# Allegro board RFPW_V10A.brd
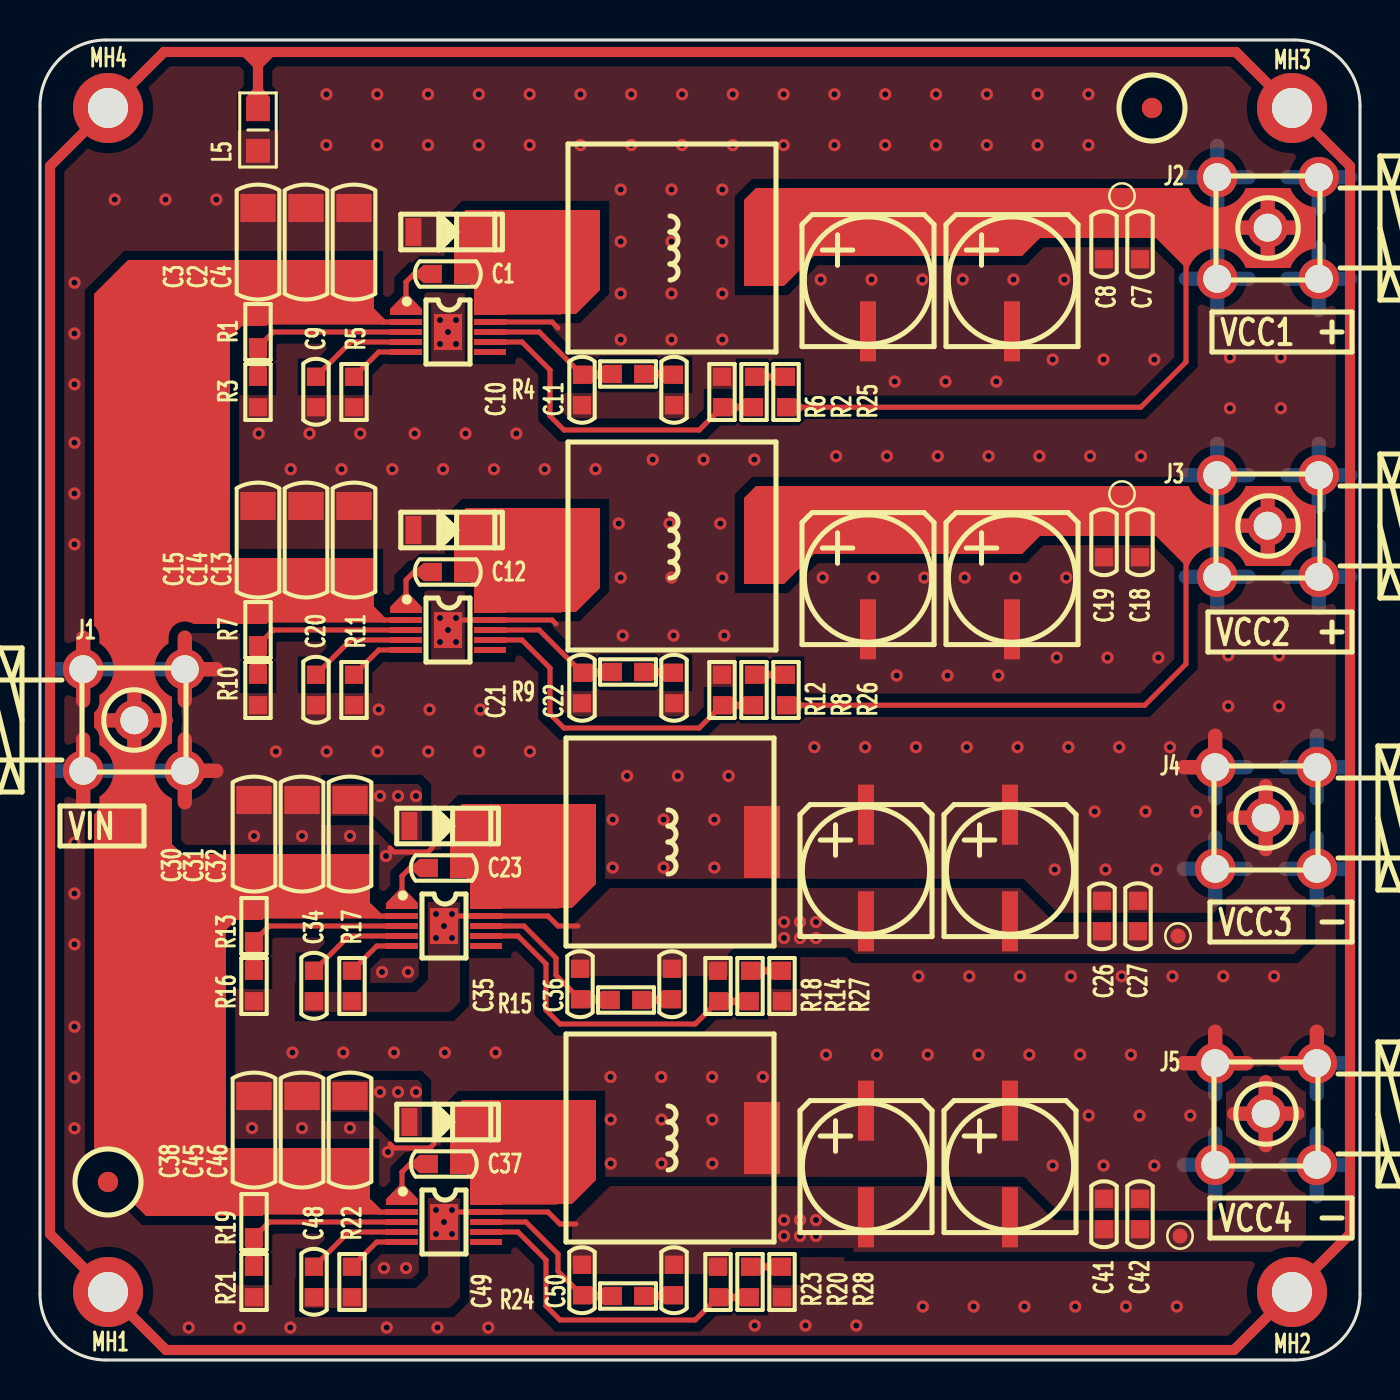
[diagram p0: board, top side]
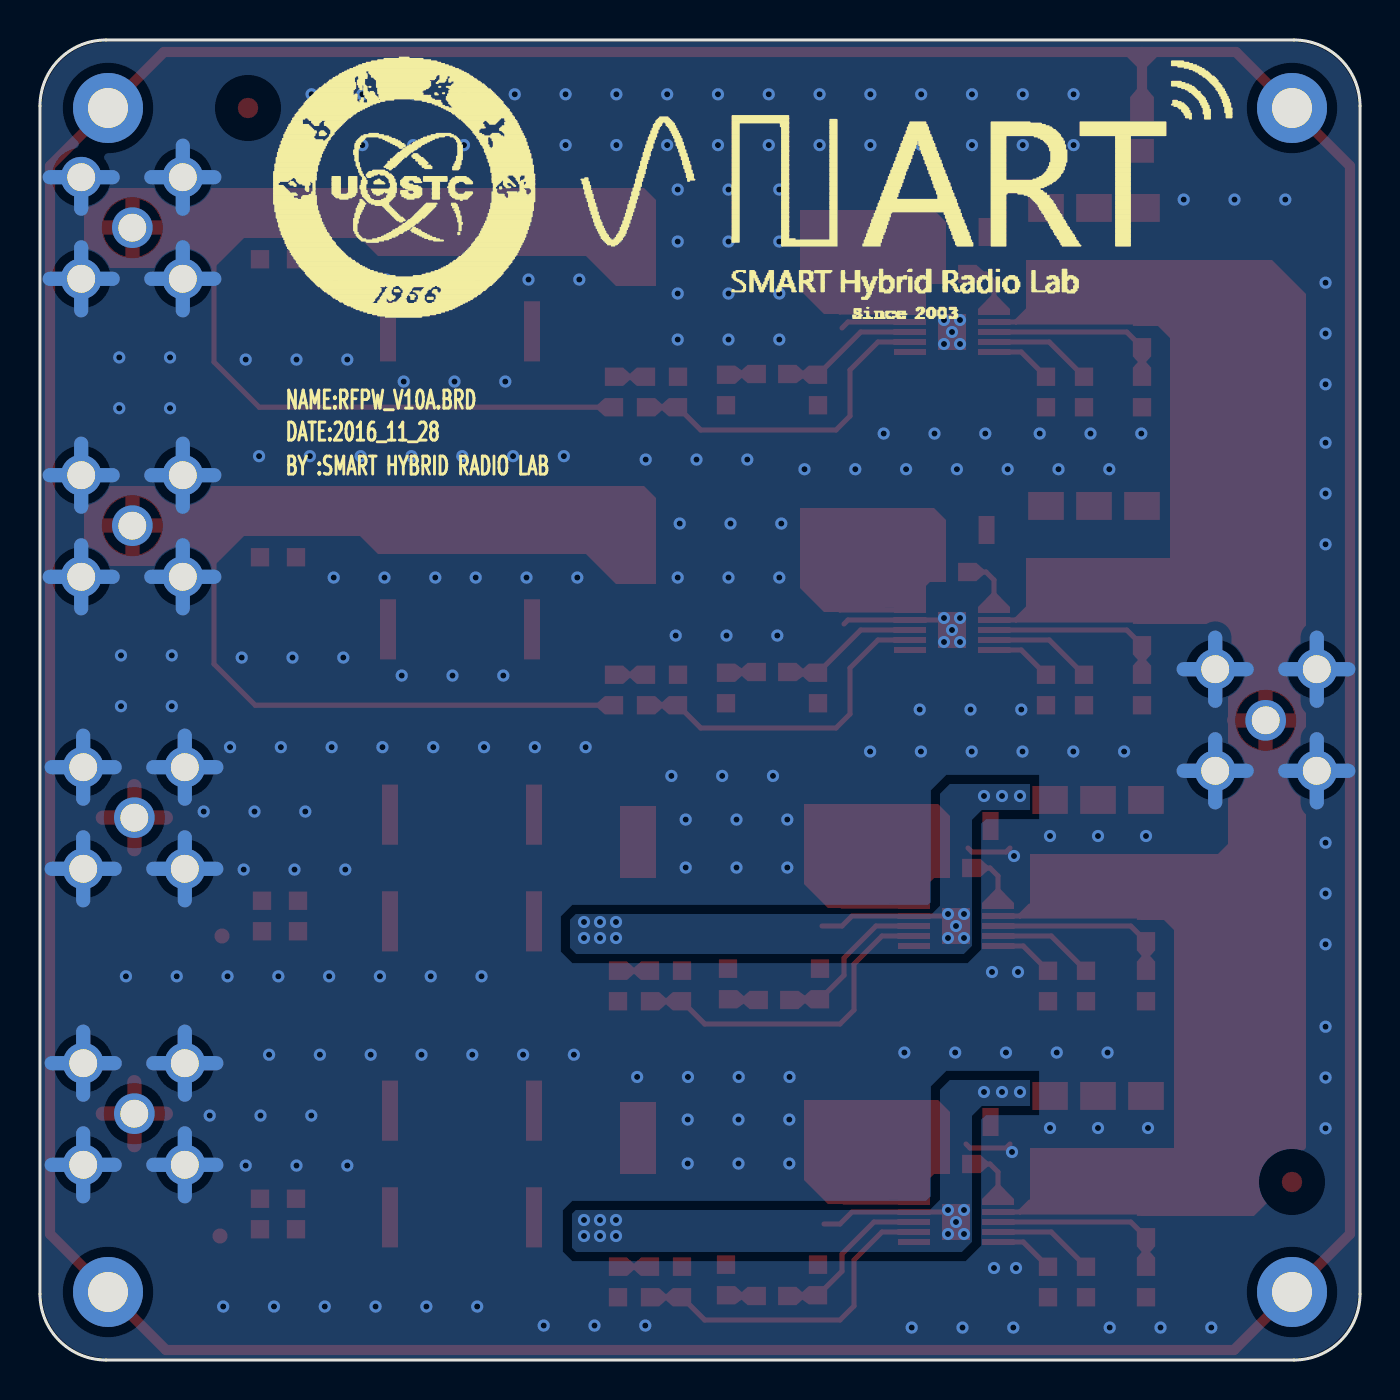
[diagram p1: board, bottom side, seen from below]

Outline 66 x 66 mm; copper layers: TOP, BOTTOM. Coordinates in mm from the lower left corner of the outline.
Outline path: 0,62.7 0,3.3 arc(0.97,0.97) 3.3,0 62.7,0 arc(65.03,0.97) 66,3.3 66,62.7 arc(65.03,65.03) 62.7,66 3.3,66 arc(0.97,65.03) 0,62.7

## Placement (name value [footprint] x y rotation side)
C1  0.1uF_50V  [CC0603]  20.4 54.3 180 top
C2  2.2uF_50V  [CC1206]  13.3 55.9 90 top
C3  2.2uF_50V  [CC1206]  10.9 55.9 90 top
C4  2.2uF_50V  [CC1206]  15.7 55.9 90 top
C5  47uF_50V_ED6R3  [CAP-ED6R3]  41.4 54.1 90 top
C6  47uF_50V_ED6R3  [CAP-ED6R3]  48.6 54.1 90 top
C7  0.1uF_50V  [CC0603]  55 55.8 270 top
C8  1nF_50V  [CC0603]  53.2 55.8 270 top
C9  6.8nF_50V  [CC0603]  13.8 48.4 90 top
C10  2.7nF_50V  [CC0603]  27.1 48.5 90 top
C11  2.7nF_50V  [CC0603]  31.7 48.5 90 top
C12  0.1uF_50V  [CC0603]  20.4 39.4 180 top
C13  2.2uF_50V  [CC1206]  15.7 41 90 top
C14  2.2uF_50V  [CC1206]  13.3 41 90 top
C15  2.2uF_50V  [CC1206]  10.9 41 90 top
C16  47uF_50V_ED6R3  [CAP-ED6R3]  48.6 39.2 90 top
C17  47uF_50V_ED6R3  [CAP-ED6R3]  41.4 39.2 90 top
C18  0.1uF_50V  [CC0603]  55 40.9 270 top
C19  1nF_50V  [CC0603]  53.2 40.9 270 top
C20  6.8nF_50V  [CC0603]  13.8 33.5 90 top
C21  2.7nF_50V  [CC0603]  27.1 33.6 90 top
C22  2.7nF_50V  [CC0603]  31.7 33.6 90 top
C23  0.1uF_50V  [CC0603]  20.2 24.6 180 top
C24  47uF_50V_ED6R3  [CAP-ED6R3]  41.3 24.6 90 top
C25  47uF_50V_ED6R3  [CAP-ED6R3]  48.5 24.6 90 top
C26  0.1uF_50V  [CC0603]  53.1 22.2 270 top
C27  1nF_50V  [CC0603]  54.9 22.2 270 top
C30  2.2uF_50V  [CC1206]  10.7 26.3 90 top
C31  2.2uF_50V  [CC1206]  13.1 26.3 90 top
C32  2.2uF_50V  [CC1206]  15.5 26.3 90 top
C34  0.1uF_50V  [CC0603]  13.7 18.7 90 top
C35  82pF_50V  [CC0603]  27 18.8 270 top
C36  27nF_50V  [CC0603]  31.6 18.8 270 top
C37  0.1uF_50V  [CC0603]  20.2 9.8 180 top
C38  2.2uF_50V  [CC1206]  10.7 11.5 90 top
C39  47uF_50V_ED6R3  [CAP-ED6R3]  41.3 9.8 90 top
C40  47uF_50V_ED6R3  [CAP-ED6R3]  48.5 9.8 90 top
C41  0.1uF_50V  [CC0603]  53.2 7.3 270 top
C42  1nF_50V  [CC0603]  55 7.3 270 top
C45  2.2uF_50V  [CC1206]  13.1 11.5 90 top
C46  2.2uF_50V  [CC1206]  15.5 11.5 90 top
C48  0.1uF_50V  [CC0603]  13.7 3.9 90 top
C49  82pF_50V  [CC0603]  27.1 4 270 top
C50  27nF_50V  [CC0603]  31.7 4 270 top
D1  LMBR0540T1G_SOD-123  [SOD-123]  18.8 56.4 0 top
D2  LMBR0540T1G_SOD-123  [SOD-123]  18.8 41.5 0 top
D3  LMBR0540T1G_SOD-123  [SOD-123]  18.6 26.7 0 top
D4  LMBR0540T1G_SOD-123  [SOD-123]  18.6 11.9 0 top
J1  SMA-50R  [SMA-50R-DIP]  4.7 32 180 top
J2  SMA-50R  [SMA-50R-DIP]  61.4 56.6 0 top
J3  SMA-50R  [SMA-50R-DIP]  61.4 41.7 0 top
J4  SMA-50R  [SMA-50R-DIP]  61.3 27.1 0 top
J5  SMA-50R  [SMA-50R-DIP]  61.3 12.3 0 top
L1  SMDRH105R-331M  [L100100]  31.6 55.6 0 top
L2  SMDRH105R-331M  [L100100]  31.6 40.7 0 top
L3  SMDRH104R-151MT  [L100100]  31.5 25.9 0 top
L4  SMDRH104R-151MT  [L100100]  31.5 11.1 0 top
L5  BEAD_BLM21PG600  [LC0805]  10.9 61.5 270 top
MH1  Hold  [HOLD175D100]  3.4 3.4 0 top
MH2  Hold  [HOLD175D100]  62.6 3.4 0 top
MH3  Hold  [HOLD175D100]  62.6 62.6 0 top
MH4  Hold  [HOLD175D100]  3.4 62.6 0 top
MP1  MarkPoint  [MARKPOINT_R3]  55.6 62.6 0 top
MP2  MarkPoint  [MARKPOINT_R3]  3.4 8.9 0 top
NOREF  -  []  6 0 90 top
NOREF#2  -  []  0 3.7 0 top
NOREF#3  -  []  5 0 90 top
NOREF#4  -  []  0 3.7 0 top
NOREF#5  -  []  5 0 90 top
NOREF#6  -  []  0 3.7 0 top
R1  105K  [RC0603]  10.9 51.4 270 top
R2  294K  [RC0603]  35.7 48.4 270 top
R3  5.11K  [RC0603]  10.9 48.4 270 top
R4  105K  [RC0603]  29.4 49.3 0 top
R5  309K  [RC0603]  15.7 48.4 270 top
R6  10K  [RC0603]  34.1 48.4 90 top
R7  105K  [RC0603]  10.9 36.5 270 top
R8  294K  [RC0603]  35.7 33.5 270 top
R9  105K  [RC0603]  29.4 34.4 0 top
R10  5.11K  [RC0603]  10.9 33.5 270 top
R11  309K  [RC0603]  15.7 33.5 270 top
R12  10K  [RC0603]  34.1 33.5 90 top
R13  105K  [RC0603]  10.7 21.7 270 top
R14  14K  [RC0603]  35.5 18.7 270 top
R15  52.3K  [RC0603]  29.3 18 0 top
R16  5.11K  [RC0603]  10.7 18.7 270 top
R17  237K  [RC0603]  15.6 18.7 270 top
R18  1K  [RC0603]  33.9 18.7 90 top
R19  105K  [RC0603]  10.7 6.9 270 top
R20  14K  [RC0603]  35.5 3.9 270 top
R21  5.11K  [RC0603]  10.7 3.9 270 top
R22  237K  [RC0603]  15.6 3.9 270 top
R23  1K  [RC0603]  33.9 3.9 90 top
R24  52.3K  [RC0603]  29.4 3.2 0 top
R25  0R  [RC0603]  37.3 48.4 90 top
R26  0R  [RC0603]  37.3 33.5 90 top
R27  0R  [RC0603]  37.1 18.7 90 top
R28  0R  [RC0603]  37.1 3.9 90 top
TP1  TestPoint  [TP-0R75]  54.1 58.2 0 top
TP2  TestPoint  [TP-0R75]  54.1 43.3 0 top
TP4  TestPoint  [TP-0R75]  56.9 21.2 0 top
TP6  TestPoint  [TP-0R75]  57 6.2 0 top
U1  TPS54060DGQR  [MSOP-10-PAD]  20.4 51.4 270 top
U2  TPS54060DGQR  [MSOP-10-PAD]  20.4 36.5 270 top
U3  TPS54060DGQR  [MSOP-10-PAD]  20.2 21.7 270 top
U5  TPS54060DGQR  [MSOP-10-PAD]  20.2 6.9 270 top

## Library data of the parts
C1 C7-C12 C18-C23 C26 C27 C34-C37 C41 C42 C48-C50 = CAP NP
C2-C4 C13-C15 C30-C32 C38 C45 C46 = CAP NP_2
C5 C6 C16 C17 C24 C25 C39 C40 = CAPT_100UF_3528_6r3V_10%_LXXXX
D1-D4 = DIODE13_1
J1-J5 = SMA-50R_0
L1-L4 = IND_BEAD_0805_600OHM_1
L5 = IND_BEAD_0805_600OHM_200MA
MH1-MH4 = Hold_1
MP1 MP2 = MarkPoint
R1-R28 = R_Generic
TP1 TP2 TP4 TP6 = TestPoint
U1-U3 U5 = TPS54060DGQR

## Footprints (pads in the part's own frame, mm; a bottom-side part is the same pattern mirrored in y, then rotated)
CAP-ED6R3
  rect 3x0.8 smd: 1(2.667,0) 2(-2.667,0)
CC0603
  rect 0.914x0.914 smd: 1(-0.762,0) 2(0.762,0)
CC1206
  rect 1.397x1.778 smd: 1(-1.702,0) 2(1.702,0)
HOLD175D100
  round 3.5 hole 2: 1(0,0)
L100100
  rect 1.8x3.6 smd: 1(-4.6,0) 2(4.6,0)
LC0805
  rect 1.194x1.194 smd: 1(-1.041,0) 2(1.041,0)
MARKPOINT_R3
  round 1.016 smd: 1(0,0)
MSOP-10-PAD
  rect 0.3x1.6 smd: 1(-1,-2.1) 2(-0.5,-2.1) 3(0,-2.1) 4(0.5,-2.1) 5(1,-2.1) 6(1,2.1) 7(0.5,2.1) 8(0,2.1) 9(-0.5,2.1) 10(-1,2.1)
  rect 1.8x1.4 smd: 11(0,0)
RC0603
  rect 0.914x0.914 smd: 1(-0.762,0) 2(0.762,0)
SMA-50R-DIP
  round 2.032 hole 1.397: 1(-0.016,0.016) 2(-2.54,2.54) 3(-2.54,-2.54) 4(2.54,-2.54) 5(2.54,2.54)
SOD-123
  rect 0.8x1.4 smd: 1(-0.127,0) 2(3.327,0)
TP-0R75
  round 0.75 smd: 1(0,0)

## Nets
GND: C2.2 C3.2 C4.2 C5.2 C6.2 C7.2 C8.2 C9.1 C10.1 C11.1 C13.2 C14.2 C15.2 C16.2 C17.2 C18.2 C19.2 C20.1 C21.1 C22.1 C24.1 C25.1 C26.1 C27.1 C30.2 C31.2 C38.2 C39.1 C40.1 C41.1 C42.1 C45.2 D1.1 D2.1 J1.2 J1.3 J1.4 J1.5 J2.2 J2.3 J2.4 J2.5 J3.2 J3.3 J3.4 J3.5 J4.2 J4.3 J4.4 J4.5 J5.2 J5.3 J5.4 J5.5 L3.2(B) L4.2(B) L5.2(B) R3.2 R5.2 R6.2 R10.2 R11.2 R12.2 R16.2 R21.2 R27.1 R28.1 U1.9(GND_1) U1.11(GND_2) U2.9(GND_1) U2.11(GND_2)
VCC_IN: C2.1 C3.1 C4.1 C13.1 C14.1 C15.1 C30.1 C31.1 C32.1 C38.1 C45.1 C46.1 J1.1 R1.1 R7.1 R13.1 R19.1 U1.2(VIN) U2.2(VIN) U3.2(VIN) U5.2(VIN)
VCC_OUT1: C5.1 C6.1 C7.1 C8.1 J2.1 L1.2(B) R25.1 TP1.1
VCC_OUT2: C16.1 C17.1 C18.1 C19.1 J3.1 L2.2(B) R26.1 TP2.1
VCC_OUT3: C24.2 C25.2 C26.2 C27.2 C32.2 C34.1 C35.1 C36.1 D3.1 J4.1 R17.2 R18.2 TP4.1 U3.9(GND_1) U3.11(GND_2)
VCC_OUT4: C39.2 C40.2 C41.2 C42.2 C46.2 C48.1 C49.1 C50.1 D4.1 J5.1 R22.2 R23.2 TP6.1 U5.9(GND_1) U5.11(GND_2)
N16732442: R1.2 R3.1 U1.3(EN)
N16756239: C9.2 U1.4(SS/TR)
N16756366: R5.1 U1.5(RT/CLK)
N16756483: C11.2 R4.2
N16756580: C10.2 R4.1 U1.8(COMP)
N16756680: R2.2 R6.1 U1.7(VSENSE)
N16756833: C1.1 D1.2 L1.1(A) U1.10(PH)
N16756916: C1.2 U1.1(BOOT)
N16758550: C20.2 U2.4(SS/TR)
N16758584: R11.1 U2.5(RT/CLK)
N16758634: C22.2 R9.2
N16758670: C21.2 R9.1 U2.8(COMP)
N16758686: R8.2 R12.1 U2.7(VSENSE)
N16758748: C12.1 D2.2 L2.1(A) U2.10(PH)
N16758800: C12.2 U2.1(BOOT)
N16759130: R7.2 R10.1 U2.3(EN)
N16760032: C34.2 U3.4(SS/TR)
N16760066: R17.1 U3.5(RT/CLK)
N16760106: C36.2 R15.2
N16760152: C35.2 R15.1 U3.8(COMP)
N16760174: R14.2 R18.1 U3.7(VSENSE)
N16760236: C23.1 D3.2 L3.1(A) U3.10(PH)
N16760288: C23.2 U3.1(BOOT)
N16760618: R13.2 R16.1 U3.3(EN)
N16764743: C37.1 D4.2 L4.1(A) U5.10(PH)
N16764977: C48.2 U5.4(SS/TR)
N16765011: R22.1 U5.5(RT/CLK)
N16765035: C50.2 R24.2
N16765097: C49.2 R24.1 U5.8(COMP)
N16765119: R20.2 R23.1 U5.7(VSENSE)
N16765233: C37.2 U5.1(BOOT)
N16765563: R19.2 R21.1 U5.3(EN)
N16769165: L5.1(A) MH1.1 MH2.1 MH3.1 MH4.1
N16776017: R2.1 R25.2
N16776390: R8.1 R26.2
N16776655: R14.1 R27.2
N16776851: R20.1 R28.2

Pads without a net: MP1 1; MP2 1; U1 6; U2 6; U3 6; U5 6

## Via types
v1: diameter 0.61, hole 0.305, TOP to BOTTOM, 256 vias

## Routing (per net, layer and track width the routed paths; a pad name or vN(x,y) marks a point on that pad's centre or on a via; arc(x,y) is an arc through that point)
GND: length 165
  TOP w0.254: v1(20.4,36.5) 20.9,37 U2.9 25.6,37 25.8,36.8 ; U1.9 25.6,51.9 25.9,51.6 ; 19.7,10.8 19.5,10.6 17.7,10.6 17.5,10.8 ; 17.5,25.6 17.7,25.4 19.4,25.4 19.6,25.6
  TOP w0.711: 7.24,27.89 J1.2 ; J1.2 8.81,29.46 ; J1.2 7.24,31.04 ; 2.16,36.12 J1.4 2.16,32.97 ; 7.24,32.97 J1.3 ; J1.3 7.24,36.12 ; J1.3 8.81,34.54 ; 63.84,16.41 J5.5 62.27,14.84 ; J5.2 60.34,14.84 ; J5.2 57.19,14.84 ; J5.2 58.76,16.41 ; 57.19,29.64 J4.2 58.76,31.21 ; 2.16,27.89 J1.5 2.16,31.04
  BOTTOM w0.711: 57.28,59.14 J2.2 ; J2.2 60.44,59.14 ; J2.2 58.86,60.72 ; J2.2 58.86,57.56 ; 62.27,9.76 J5.4 ; J5.4 63.84,8.19 ; J5.4 65.42,9.76 ; J5.4 63.84,11.34 ; 62.27,14.84 J5.5 ; J5.5 65.42,14.84 ; J5.5 63.84,16.41 ; J5.5 63.84,13.27 ; 63.94,52.48 J2.4 ; J2.4 63.94,55.63 ; J2.4 65.52,54.06 ; J2.4 62.37,54.06 ; J3.4 65.52,39.16 ; J3.4 63.94,37.59 ; J3.4 63.94,40.73 ; J3.4 62.37,39.16 ; J4.5 63.84,31.21 ; J4.5 65.42,29.64 ; J4.5 62.27,29.64 ; J4.5 63.84,28.07 ; 58.76,13.27 J5.2 ; J5.2 58.76,16.41 ; J5.2 57.19,14.84 ; J5.2 60.34,14.84 ; J3.3 60.44,39.16 ; J3.3 58.86,40.73 ; J3.3 58.86,37.59 ; J3.3 57.28,39.16 ; 58.76,22.98 J4.3 ; J4.3 58.76,26.14 ; J4.3 57.19,24.56 ; J4.3 60.34,24.56 ; J4.4 63.84,26.14 ; J4.4 62.27,24.56 ; J4.4 63.84,22.98 ; J4.4 65.42,24.56 ; 62.37,59.14 J2.5 ; J2.5 65.52,59.14 ; J2.5 63.94,57.56 ; 63.94,42.66 J3.5 ; J3.5 62.37,44.24 ; J3.5 63.94,45.81 ; J3.5 65.52,44.24 ; 2.16,32.97 J1.4 ; J1.4 0.58,34.54 ; J1.4 3.73,34.54 ; J1.4 2.16,36.12 ; 2.16,27.89 J1.5 ; J1.5 3.73,29.46 ; J1.5 0.58,29.46 ; J1.5 2.16,31.04 ; J4.2 58.76,31.21 ; J4.2 60.34,29.64 ; J4.2 57.19,29.64 ; J4.2 58.76,28.07 ; J3.2 60.44,44.24 ; J3.2 58.86,45.81 ; J3.2 58.86,42.66 ; J3.2 57.28,44.24 ; 5.67,29.46 J1.2 ; J1.2 7.24,31.04 ; J1.2 7.24,27.89 ; J1.2 8.81,29.46 ; J5.3 58.76,11.34 ; J5.3 60.34,9.76 ; J5.3 58.76,8.19 ; J5.3 57.19,9.76 ; J1.3 8.81,34.54 ; J1.3 7.24,36.12 ; J1.3 5.67,34.54 ; J1.3 7.24,32.97 ; J2.3 58.86,55.63 ; J2.3 58.86,52.48 ; J2.3 60.44,54.06 ; J2.3 57.28,54.06
  vias: v1(1.72,53.86) v1(1.72,51.32) v1(1.72,48.78) v1(1.72,45.86) v1(1.72,43.32) v1(1.72,40.78) v1(1.72,25.86) v1(1.72,23.32) v1(1.72,20.78) v1(1.72,16.66) v1(1.72,14.12) v1(1.72,11.58) v1(3.74,58.02) v1(6.28,58.02) v1(7.44,1.62) v1(8.82,58.02) v1(9.98,1.62) v1(10.6,11.6) v1(10.7,26.2) v1(10.94,46.32) v1(11.79,30.42) v1(12.54,44.54) v1(12.52,1.62) v1(12.62,15.37) v1(13.1,26.2) v1(13.1,11.6) v1(13.48,46.32) v1(14.32,63.29) v1(14.32,60.75) v1(14.33,30.42) v1(15.08,44.54) v1(15.16,15.37) v1(15.5,26.2) v1(15.5,11.6) v1(16.02,46.32) v1(16.86,63.29) v1(16.86,60.75) v1(16.94,32.52) v1(16.87,30.42) v1(17.1,19.4) v1(17.2,4.6) v1(17.3,25.2) v1(17.34,1.62) v1(17.4,10.4) v1(17.62,44.54) v1(17.7,15.37) v1(18.3,4.6) v1(18.4,19.4) v1(18.74,46.32) v1(19.4,63.29) v1(19.4,60.75) v1(19.41,30.42) v1(19.48,32.52) v1(19.88,1.62) v1(20,52) v1(20,50.8) v1(20,37.1) v1(20,35.9) v1(20.16,44.54) v1(20.24,15.37) v1(20.4,51.4) v1(20.8,52) v1(20.8,50.8) v1(20.8,37.1) v1(20.8,35.9) v1(21.28,46.32) v1(21.94,63.29) v1(21.94,60.75) v1(22.02,32.52) v1(21.95,30.42) v1(22.42,1.62) v1(22.7,44.54) v1(22.78,15.37) v1(23.82,46.32) v1(24.48,63.29) v1(24.48,60.75) v1(24.49,30.42) v1(25.24,44.54) v1(27.02,63.29) v1(27.02,60.75) v1(27.78,44.54) v1(28.52,14.15) v1(28.54,12.02) v1(28.54,9.82) v1(28.64,27.02) v1(28.64,24.62) v1(28.94,41.82) v1(29.04,58.52) v1(29.04,55.92) v1(29.04,53.32) v1(29.04,51.02) v1(29.04,39.12) v1(29.14,36.22) v1(29.35,29.2) v1(29.56,63.29) v1(29.56,60.75) v1(30.64,45.02) v1(31.06,14.15) v1(31.08,12.02) v1(31.08,9.82) v1(31.18,27.02) v1(31.18,24.62) v1(31.48,41.82) v1(31.58,58.52) v1(31.58,55.92) v1(31.58,53.32) v1(31.58,51.02) v1(31.58,39.12) v1(31.68,36.22) v1(31.89,29.2) v1(32.1,63.29) v1(32.1,60.75) v1(33.18,45.02) v1(33.6,14.15) v1(33.62,12.02) v1(33.62,9.82) v1(33.72,27.02) v1(33.72,24.62) v1(34.02,41.82) v1(34.12,58.52) v1(34.12,55.92) v1(34.12,53.32) v1(34.12,51.02) v1(34.12,39.12) v1(34.22,36.22) v1(34.43,29.2) v1(34.64,63.29) v1(34.64,60.75) v1(35.72,45.02) v1(35.74,1.72) v1(36.14,14.15) v1(37.18,63.29) v1(37.18,60.75) v1(38.28,1.72) v1(38.72,30.64) v1(39.04,54.02) v1(39.14,39.12) v1(39.31,15.26) v1(39.72,63.29) v1(39.72,60.75) v1(39.81,45.19) v1(40.82,1.72) v1(41.26,30.64) v1(41.58,54.02) v1(41.68,39.12) v1(41.85,15.26) v1(42.26,63.29) v1(42.26,60.75) v1(42.35,45.19) v1(42.74,48.92) v1(42.84,34.22) v1(43.8,30.64) v1(43.92,19.18) v1(44.12,54.02) v1(44.14,2.67) v1(44.22,39.12) v1(44.39,15.26) v1(44.8,63.29) v1(44.8,60.75) v1(44.89,45.19) v1(45.28,48.92) v1(45.38,34.22) v1(46.14,54.02) v1(46.24,39.12) v1(46.34,30.64) v1(46.46,19.18) v1(46.68,2.67) v1(46.93,15.26) v1(47.34,63.29) v1(47.34,60.75) v1(47.43,45.19) v1(47.82,48.92) v1(47.92,34.22) v1(48.68,54.02) v1(48.78,39.12) v1(48.88,30.64) v1(49,19.18) v1(49.22,2.67) v1(49.47,15.26) v1(49.88,63.29) v1(49.88,60.75) v1(49.97,45.19) v1(50.64,50.02) v1(50.64,9.72) v1(50.74,24.52) v1(50.84,35.12) v1(51.22,54.02) v1(51.32,39.12) v1(51.42,30.64) v1(51.54,19.18) v1(51.76,2.67) v1(52.01,15.26) v1(52.42,63.29) v1(52.42,60.75) v1(52.44,12.22) v1(52.51,45.19) v1(52.74,27.42) v1(53.18,50.02) v1(53.18,9.72) v1(53.28,24.52) v1(53.38,35.12) v1(53.96,30.64) v1(54.08,19.18) v1(54.3,2.67) v1(54.55,15.26) v1(55.05,45.19) v1(54.98,12.22) v1(55.28,27.42) v1(55.72,50.02) v1(55.72,9.72) v1(55.82,24.52) v1(55.92,35.12) v1(56.5,30.64) v1(56.62,19.18) v1(56.84,2.67) v1(57.52,12.22) v1(57.82,27.42) v1(59.16,19.18) v1(59.41,35.23) v1(59.41,32.69) v1(59.5,50.13) v1(59.5,47.59) v1(61.7,19.18) v1(62.04,50.13) v1(62.04,47.59) v1(61.95,35.23) v1(61.95,32.69)
VCC_IN: length 39.6
  TOP w0.254: U2.2 17.2,37 ; 17.2,37 11.16,37 R7.1 ; 17.2,37 16.5,37.7 ; 17,7.4 U5.2 ; 17,7.4 16.5,7.9 ; 17,7.4 10.96,7.4 R19.1 ; U1.2 17.2,51.9 ; 17.2,51.9 11.16,51.9 R1.1 ; 17.2,51.9 16.6,52.5 ; 17,22.2 10.96,22.2 R13.1 ; 17,22.2 U3.2 ; 17,22.2 16.5,22.7
  TOP w0.711: J1.1 4.72,33.56 ; J1.1 4.72,30.41 ; J1.1 6.29,31.98 ; J1.1 3.14,31.98
VCC_OUT1: length 33.1
  TOP w0.254: 57.3,55.8 57.3,49.9 55.04,47.64 R25.1
  TOP w0.711: 59.81,56.62 J2.1 ; J2.1 61.38,58.19 ; J2.1 62.96,56.62 ; J2.1 61.38,55.04
VCC_OUT2: length 32.2
  TOP w0.254: 57.3,39.8 57.3,34.8 55.24,32.74 R26.1
  TOP w0.711: J3.1 62.96,41.72 ; J3.1 61.38,43.29 ; J3.1 61.38,40.14 ; J3.1 59.81,41.72
VCC_OUT3: length 12.8
  TOP w0.254: v1(20.6,22.3) 20.7,22.2 U3.9 25.4,22.2 25.9,21.7 26.9,21.7
  TOP w0.711: 61.28,25.54 J4.1 ; J4.1 59.71,27.12 ; J4.1 62.86,27.12 ; J4.1 61.28,28.69
  vias: v1(17,28.2) v1(17.9,28.2) v1(18.8,28.2) v1(19.8,22.3) v1(19.8,21.1) v1(20.2,21.7) v1(20.6,21.1) v1(37.2,21.9) v1(37.2,21.1) v1(38,21.9) v1(38,21.1) v1(38.8,21.9) v1(38.8,21.1)
VCC_OUT4: length 13.4
  TOP w0.254: 26.8,6.8 26,6.8 25.4,7.4 U5.9 20.7,7.4 v1(20.2,6.9)
  TOP w0.711: J5.1 61.28,13.89 ; J5.1 61.28,10.74 ; J5.1 59.71,12.32 ; J5.1 62.86,12.32
  vias: v1(17,13.4) v1(17.9,13.4) v1(18.8,13.4) v1(19.8,7.5) v1(19.8,6.3) v1(20.6,7.5) v1(20.6,6.3) v1(37.2,7) v1(37.2,6.2) v1(38,7) v1(38,6.2) v1(38.8,7) v1(38.8,6.2)
N16732442: length 9.2
  TOP w0.203: R1.2 R3.1
  TOP w0.254: U1.3 11.66,51.4 R1.2
N16756239: length 5.2
  TOP w0.254: U1.4 15.54,50.9 C9.2
N16756366: length 3.1
  TOP w0.254: R5.1 16.94,50.4 U1.5
N16756483: length 1.6
  TOP w0.254: C11.2 31.66,49.3 R4.2
N16756580: length 7
  TOP w0.254: R4.1 28.6,49.26 C10.2 24.96,51.4 U1.8
N16756680: length 16.8
  TOP w0.254: R2.2 R6.1 32.96,46.5 26.2,46.5 25.5,47.2 25.5,49.5 24.1,50.9 U1.7
N16756833: length 4.1
  TOP w0.254: 22,52.4 U1.10 26,52.4 26.1,52.5
N16756916: length 3
  TOP w0.254: C1.2 18.7,54.3 18.3,53.9 U1.1
N16758550: length 5.2
  TOP w0.254: C20.2 15.54,36 U2.4
N16758584: length 3.1
  TOP w0.254: U2.5 16.94,35.5 R11.1
N16758634: length 1.6
  TOP w0.254: C22.2 31.66,34.4 R9.2
N16758670: length 7
  TOP w0.254: R9.1 28.6,34.36 C21.2 24.96,36.5 U2.8
N16758686: length 16.8
  TOP w0.254: R8.2 R12.1 32.96,31.6 26.2,31.6 25.5,32.3 25.5,34.6 24.1,36 U2.7
N16758748: length 3.6
  TOP w0.254: 26.1,37.6 26,37.5 U2.10
N16758800: length 3
  TOP w0.254: U2.1 18.3,39 18.7,39.4 C12.2
N16759130: length 9.2
  TOP w0.203: R7.2 R10.1
  TOP w0.254: U2.3 11.66,36.5 R7.2
N16760032: length 5.1
  TOP w0.254: C34.2 15.44,21.2 U3.4
N16760066: length 3
  TOP w0.254: R17.1 16.84,20.7 U3.5
N16760106: length 1.6
  TOP w0.254: C36.2 31.56,18 R15.2
N16760152: length 8.3
  TOP w0.254: U3.8 24.2,21.7 25.8,20.1 25.8,19.24 C35.2 28.5,18.04 R15.1
N16760174: length 16.8
  TOP w0.254: R14.2 R18.1 32.76,16.8 26,16.8 25.3,17.5 25.3,19.8 23.9,21.2 U3.7
N16760236: length 3.6
  TOP w0.254: U3.10 25.9,22.7
N16760288: length 3
  TOP w0.254: U3.1 18.1,24.2 18.5,24.6 C23.2
N16760618: length 9.2
  TOP w0.254: U3.3 11.46,21.7 R13.2 R16.1
N16764743: length 3.5
  TOP w0.254: U5.10 25.8,7.9
N16764977: length 5.1
  TOP w0.254: C48.2 15.44,6.4 U5.4
N16765011: length 3
  TOP w0.254: U5.5 16.84,5.9 R22.1
N16765035: length 1.6
  TOP w0.254: C50.2 31.66,3.2 R24.2
N16765097: length 8.4
  TOP w0.254: U5.8 24.3,6.9 25.9,5.3 25.9,4.44 C49.2 27.14,3.2 R24.1
N16765119: length 16.8
  TOP w0.254: U5.7 23.9,6.4 25.3,5 25.3,2.7 26,2 32.76,2 R23.1 R20.2
N16765233: length 3
  TOP w0.254: U5.1 18.1,9.4 18.5,9.8 C37.2
N16765563: length 9.2
  TOP w0.254: R21.1 R19.2 11.46,6.9 U5.3
N16769165: length 249.2
  TOP w0.508: 10.9,65.4 59.8,65.4 MH3.1 65.5,59.7 65.5,6.3 MH2.1 59.7,0.5 6.3,0.5 MH1.1 0.5,6.3 0.5,59.7 MH4.1 6.2,65.4 10.9,65.4 ; 10.9,65.4 L5.1
N16776017: length 1.6
  TOP w0.254: R2.1 R25.2
N16776390: length 1.6
  TOP w0.254: R26.2 R8.1
N16776655: length 1.6
  TOP w0.254: R27.2 R14.1
N16776851: length 1.6
  TOP w0.254: R20.1 R28.2

## Copper pours and planes (outline as drawn; the poured copper is in the pictures)
GND on TOP: 3.3,0.1 1.05,1.05 0.1,3.3 0.1,62.7 1.04,64.96 3.3,65.9 62.7,65.9 64.95,64.95 65.9,62.7 65.9,3.3 64.96,1.04 62.7,0.1 ; 12 cut-outs
GND on BOTTOM: 0.1,3.3 1.05,1.05 3.3,0.1 62.7,0.1 64.96,1.04 65.9,3.3 65.9,62.7 64.95,64.95 62.7,65.9 3.3,65.9 1.04,64.96 0.1,62.7
VCC_IN on TOP (solid shape): 16.7,52.5 17.04,52.16 17.04,51.98 11.42,51.98 11.14,51.7 10.1,51.7 9.5,51.1 9.5,40.1 16.7,40.1 16.7,37.6 17.04,37.26 17.04,37.08 11.42,37.08 11.14,36.8 7.68,36.8 7.64,36.82 7.57,36.86 7.5,36.89 7.42,36.91 7.35,36.92 7.27,36.93 7.19,36.93 7.11,36.92 7.03,36.9 6.96,36.88 6.88,36.85 6.82,36.81 6.75,36.76 6.69,36.71 6.63,36.66 6.58,36.6 6.54,36.53 6.5,36.46 6.47,36.39 6.45,36.31 6.44,36.23 6.43,36.15 6.43,36.12 6.43,35.83 6.38,35.8 6.29,35.74 6.21,35.66 6.13,35.59 6.06,35.51 5.99,35.42 5.93,35.33 5.88,35.23 5.84,35.13 5.8,35.03 5.77,34.93 5.74,34.82 5.73,34.71 5.72,34.6 5.72,34.5 5.72,34.39 5.74,34.28 5.76,34.17 5.79,34.07 5.83,33.97 5.87,33.87 5.92,33.77 5.98,33.68 6.05,33.59 6.12,33.51 6.19,33.43 6.28,33.36 6.36,33.29 6.46,33.23 6.55,33.18 6.6,33.16 6.6,30.84 6.55,30.82 6.45,30.77 6.36,30.7 6.27,30.64 6.19,30.56 6.11,30.48 6.04,30.4 5.97,30.3 5.91,30.21 5.86,30.11 5.82,30.01 5.78,29.9 5.75,29.79 5.73,29.68 5.72,29.57 5.72,29.46 5.72,29.35 5.73,29.24 5.75,29.13 5.78,29.02 5.82,28.91 5.86,28.81 5.91,28.71 5.97,28.62 6.04,28.52 6.11,28.44 6.19,28.36 6.27,28.28 6.36,28.22 6.45,28.15 6.55,28.1 6.6,28.08 6.6,25.8 7.1,25.3 16.5,25.3 16.5,22.8 16.84,22.46 16.84,22.28 11.22,22.28 10.94,22 9.8,22 9.3,21.5 9.3,10.6 16.5,10.6 16.5,8 16.84,7.66 16.84,7.48 11.22,7.48 10.94,7.2 5.3,7.2 4.67,7.83 4.75,7.95 4.81,8.05 4.87,8.15 4.92,8.25 4.96,8.36 4.99,8.47 5.02,8.58 5.04,8.69 5.05,8.8 5.05,8.92 5.05,9.03 5.03,9.14 5.01,9.26 4.98,9.37 4.95,9.48 4.9,9.58 4.85,9.68 4.8,9.78 4.73,9.88 4.66,9.97 4.58,10.05 4.5,10.13 4.42,10.2 4.32,10.27 4.23,10.33 4.13,10.38 4.02,10.43 3.91,10.47 3.8,10.5 3.69,10.53 3.58,10.54 3.47,10.55 3.35,10.55 3.24,10.54 3.12,10.53 3.01,10.51 2.94,10.49 2.9,10.48 2.85,10.49 2.82,10.5 2.78,10.52 2.75,10.55 2.73,10.59 2.71,10.63 2.7,10.67 2.7,10.69 2.7,27.28 2.73,27.3 2.78,27.36 2.83,27.42 2.87,27.48 2.9,27.55 2.93,27.62 2.95,27.7 2.97,27.77 2.97,27.85 2.97,27.89 2.97,28.17 3.02,28.2 3.11,28.27 3.19,28.34 3.27,28.41 3.34,28.5 3.41,28.58 3.47,28.68 3.52,28.77 3.57,28.87 3.61,28.97 3.64,29.08 3.66,29.19 3.68,29.3 3.68,29.41 3.68,29.51 3.68,29.62 3.66,29.73 3.64,29.84 3.61,29.95 3.57,30.05 3.52,30.15 3.47,30.24 3.41,30.34 3.34,30.42 3.27,30.51 3.19,30.58 3.11,30.65 3.02,30.72 2.97,30.75 2.97,31.04 2.97,31.07 2.97,31.15 2.95,31.22 2.93,31.3 2.9,31.37 2.87,31.44 2.83,31.5 2.78,31.56 2.73,31.62 2.7,31.64 2.7,31.98 3.24,31.98 3.25,31.88 3.26,31.77 3.28,31.66 3.31,31.55 3.34,31.45 3.38,31.35 3.44,31.25 3.49,31.16 3.56,31.07 3.63,30.99 3.7,30.91 3.78,30.84 3.87,30.78 3.96,30.72 4.06,30.66 4.16,30.62 4.26,30.58 4.37,30.55 4.47,30.53 4.58,30.52 4.69,30.51 4.8,30.51 4.91,30.52 5.01,30.54 5.12,30.57 5.22,30.6 5.32,30.64 5.42,30.69 5.51,30.75 5.6,30.81 5.69,30.88 5.77,30.95 5.84,31.03 5.91,31.12 5.97,31.21 6.02,31.3 6.07,31.4 6.11,31.5 6.14,31.61 6.16,31.71 6.18,31.82 6.19,31.93 6.19,32.04 6.18,32.15 6.16,32.25 6.14,32.36 6.11,32.47 6.07,32.57 6.02,32.67 5.97,32.76 5.91,32.85 5.84,32.94 5.77,33.02 5.69,33.09 5.6,33.16 5.51,33.22 5.42,33.28 5.32,33.33 5.22,33.37 5.12,33.4 5.01,33.43 4.91,33.45 4.8,33.46 4.69,33.46 4.58,33.45 4.47,33.44 4.37,33.42 4.26,33.39 4.16,33.35 4.06,33.3 3.96,33.25 3.87,33.19 3.78,33.13 3.7,33.05 3.63,32.98 3.56,32.89 3.49,32.81 3.44,32.71 3.38,32.62 3.34,32.52 3.31,32.41 3.28,32.31 3.26,32.2 3.25,32.09 3.24,31.98 2.7,31.98 2.7,32.36 2.73,32.38 2.78,32.44 2.83,32.5 2.87,32.56 2.9,32.63 2.93,32.7 2.95,32.78 2.97,32.85 2.97,32.93 2.97,32.97 2.97,33.25 3.02,33.28 3.11,33.35 3.19,33.42 3.27,33.49 3.34,33.58 3.41,33.66 3.47,33.76 3.52,33.85 3.57,33.95 3.61,34.05 3.64,34.16 3.66,34.27 3.68,34.38 3.68,34.49 3.68,34.59 3.68,34.7 3.66,34.81 3.64,34.92 3.61,35.03 3.57,35.13 3.52,35.23 3.47,35.32 3.41,35.42 3.34,35.5 3.27,35.59 3.19,35.66 3.11,35.73 3.02,35.8 2.97,35.83 2.97,36.12 2.97,36.15 2.97,36.23 2.95,36.3 2.93,36.38 2.9,36.45 2.87,36.52 2.83,36.58 2.78,36.64 2.73,36.7 2.7,36.72 2.7,53.3 4.4,55 16.7,55
VCC_OUT1 on TOP (solid shape): 57.43,58.6 57.45,58.55 57.5,58.45 57.56,58.35 57.62,58.26 57.69,58.17 57.76,58.08 57.84,58.01 57.93,57.93 58.02,57.87 58.11,57.81 58.21,57.76 58.31,57.72 58.42,57.68 58.53,57.65 58.64,57.63 58.75,57.62 58.86,57.62 58.97,57.62 59.08,57.63 59.19,57.65 59.3,57.68 59.41,57.72 59.51,57.76 59.61,57.81 59.7,57.87 59.79,57.93 59.88,58.01 59.96,58.08 60.03,58.17 60.1,58.26 60.16,58.35 60.22,58.45 60.27,58.55 60.29,58.6 62.51,58.6 62.53,58.55 62.58,58.45 62.63,58.36 62.69,58.27 62.75,58.18 62.83,58.1 62.9,58.02 62.98,57.95 63.07,57.89 63.16,57.83 63.25,57.78 63.35,57.73 63.45,57.7 63.56,57.66 63.66,57.64 63.8,57.62 63.8,55.58 63.66,55.56 63.56,55.54 63.45,55.5 63.35,55.47 63.25,55.42 63.16,55.37 63.07,55.31 62.98,55.25 62.9,55.18 62.83,55.1 62.75,55.02 62.69,54.93 62.63,54.84 62.58,54.75 62.53,54.65 62.51,54.6 60.29,54.6 60.27,54.65 60.22,54.75 60.17,54.85 60.11,54.94 60.04,55.03 59.97,55.11 59.89,55.18 59.81,55.26 59.72,55.32 59.62,55.38 59.53,55.43 59.43,55.48 59.32,55.51 59.22,55.54 59.11,55.56 59,55.58 58.89,55.58 58.78,55.58 58.67,55.57 58.57,55.56 58.46,55.53 58.35,55.5 58.25,55.46 58.15,55.41 58.06,55.36 57.97,55.3 57.88,55.23 57.8,55.16 57.72,55.08 57.65,54.99 57.59,54.9 57.53,54.81 57.48,54.71 57.43,54.6 57.3,54.6 55.8,56.1 50,56.1 49.1,55.2 38.7,55.2 37.2,53.7 35.2,53.7 35.2,56.62 59.91,56.62 59.91,56.51 59.93,56.4 59.95,56.29 59.97,56.19 60.01,56.08 60.05,55.98 60.1,55.89 60.16,55.79 60.22,55.71 60.29,55.62 60.37,55.55 60.45,55.47 60.54,55.41 60.63,55.35 60.73,55.3 60.83,55.25 60.93,55.21 61.03,55.18 61.14,55.16 61.25,55.15 61.36,55.14 61.47,55.14 61.57,55.15 61.68,55.17 61.79,55.2 61.89,55.23 61.99,55.27 62.09,55.32 62.18,55.38 62.27,55.44 62.36,55.51 62.44,55.58 62.51,55.66 62.58,55.75 62.64,55.84 62.69,55.93 62.74,56.03 62.78,56.13 62.81,56.24 62.83,56.35 62.85,56.45 62.86,56.56 62.86,56.67 62.85,56.78 62.83,56.89 62.81,56.99 62.78,57.1 62.74,57.2 62.69,57.3 62.64,57.39 62.58,57.48 62.51,57.57 62.44,57.65 62.36,57.72 62.27,57.79 62.18,57.85 62.09,57.91 61.99,57.96 61.89,58 61.79,58.03 61.68,58.06 61.57,58.08 61.47,58.09 61.36,58.09 61.25,58.08 61.14,58.07 61.03,58.05 60.93,58.02 60.83,57.98 60.73,57.94 60.63,57.88 60.54,57.82 60.45,57.76 60.37,57.69 60.29,57.61 60.22,57.53 60.16,57.44 60.1,57.35 60.05,57.25 60.01,57.15 59.97,57.05 59.95,56.94 59.93,56.83 59.91,56.72 59.91,56.62 35.2,56.62 35.2,58 35.8,58.6
VCC_OUT2 on TOP (solid shape): 57.43,43.7 57.45,43.65 57.5,43.55 57.56,43.45 57.62,43.36 57.69,43.27 57.76,43.18 57.84,43.11 57.93,43.03 58.02,42.97 58.11,42.91 58.21,42.86 58.31,42.82 58.42,42.78 58.53,42.75 58.64,42.73 58.75,42.72 58.86,42.72 58.97,42.72 59.08,42.73 59.19,42.75 59.3,42.78 59.41,42.82 59.51,42.86 59.61,42.91 59.7,42.97 59.79,43.03 59.88,43.11 59.96,43.18 60.03,43.27 60.1,43.36 60.16,43.45 60.22,43.55 60.27,43.65 60.29,43.7 62.51,43.7 62.53,43.65 62.58,43.55 62.63,43.46 62.69,43.37 62.75,43.28 62.83,43.2 62.9,43.12 62.98,43.05 63.07,42.99 63.16,42.93 63.25,42.88 63.35,42.83 63.45,42.8 63.56,42.76 63.66,42.74 63.8,42.72 63.8,40.68 63.66,40.66 63.56,40.64 63.45,40.6 63.35,40.57 63.25,40.52 63.16,40.47 63.07,40.41 62.98,40.35 62.9,40.28 62.83,40.2 62.75,40.12 62.69,40.03 62.63,39.94 62.58,39.85 62.53,39.75 62.51,39.7 60.29,39.7 60.27,39.75 60.22,39.85 60.17,39.95 60.11,40.04 60.04,40.13 59.97,40.21 59.89,40.28 59.81,40.36 59.72,40.42 59.62,40.48 59.53,40.53 59.43,40.58 59.32,40.61 59.22,40.64 59.11,40.66 59,40.68 58.89,40.68 58.78,40.68 58.67,40.67 58.57,40.66 58.46,40.63 58.35,40.6 58.25,40.56 58.15,40.51 58.06,40.46 57.97,40.4 57.88,40.33 57.8,40.26 57.72,40.18 57.65,40.09 57.59,40 57.53,39.91 57.48,39.81 57.43,39.7 57.3,39.7 55.8,41.2 50,41.2 49.1,40.3 38.7,40.3 37.2,38.8 35.2,38.8 35.2,41.72 59.91,41.72 59.91,41.61 59.93,41.5 59.95,41.39 59.97,41.29 60.01,41.18 60.05,41.08 60.1,40.99 60.16,40.89 60.22,40.81 60.29,40.72 60.37,40.65 60.45,40.57 60.54,40.51 60.63,40.45 60.73,40.4 60.83,40.35 60.93,40.31 61.03,40.28 61.14,40.26 61.25,40.25 61.36,40.24 61.47,40.24 61.57,40.25 61.68,40.27 61.79,40.3 61.89,40.33 61.99,40.37 62.09,40.42 62.18,40.48 62.27,40.54 62.36,40.61 62.44,40.68 62.51,40.76 62.58,40.85 62.64,40.94 62.69,41.03 62.74,41.13 62.78,41.23 62.81,41.34 62.83,41.45 62.85,41.55 62.86,41.66 62.86,41.77 62.85,41.88 62.83,41.99 62.81,42.09 62.78,42.2 62.74,42.3 62.69,42.4 62.64,42.49 62.58,42.58 62.51,42.67 62.44,42.75 62.36,42.82 62.27,42.89 62.18,42.95 62.09,43.01 61.99,43.06 61.89,43.1 61.79,43.13 61.68,43.16 61.57,43.18 61.47,43.19 61.36,43.19 61.25,43.18 61.14,43.17 61.03,43.15 60.93,43.12 60.83,43.08 60.73,43.04 60.63,42.98 60.54,42.92 60.45,42.86 60.37,42.79 60.29,42.71 60.22,42.63 60.16,42.54 60.1,42.45 60.05,42.35 60.01,42.25 59.97,42.15 59.95,42.04 59.93,41.93 59.91,41.82 59.91,41.72 35.2,41.72 35.2,43.1 35.8,43.7
VCC_OUT3 on TOP: 14.5,28.8 18.9,28.8 19.1,28.6 19.1,25.9 18,25.9 16.7,27.2 14.5,27.2
VCC_OUT3 on TOP: 13.2,18.4 18.8,18.4 19.4,19 19.4,22.9 21,22.9 21,17.9 20.5,17.4 13.2,17.4
VCC_OUT3 on TOP: 26.6,19.2 34.4,19.2 34.4,20.3 34.7,20.6 40.5,20.6 40.8,20.3 62.7,20.3 63.3,20.9 63.3,28.9 62.9,29.3 62.9,29.1 60,29.1 59.3,28.4 59.3,22.3 58.9,21.9 50.7,21.9 49,23.6 28.5,23.6 26.6,21.7
VCC_OUT3 on BOTTOM: 19.8,20.3 19.4,20.7 19.4,27 18.9,27.5 16.5,27.5 16.5,28.8 20.5,28.8 21,28.3 21,22.7 21.4,22.3 39.2,22.3 39.5,22 39.5,20.6 39.2,20.3
VCC_OUT4 on TOP: 13.2,3.6 18.8,3.6 19.4,4.2 19.4,8.1 21,8.1 21,3.1 20.5,2.6 13.2,2.6
VCC_OUT4 on TOP: 14.5,14 18.9,14 19.1,13.8 19.1,11.1 18,11.1 16.7,12.4 14.5,12.4
VCC_OUT4 on TOP: 26.6,4.3 34.4,4.3 34.4,5.4 34.6,5.6 40.68,5.6 40.68,5.4 62.7,5.4 63.3,6 63.3,14 62.9,14.4 62.9,14.2 60,14.2 59.3,13.5 59.3,7.4 58.9,7 50.7,7 49,8.7 28.5,8.7 26.6,6.8
VCC_OUT4 on BOTTOM: 19.9,5.4 19.4,5.9 19.4,12.2 18.9,12.7 16.5,12.7 16.5,14 20.5,14 21,13.5 21,8 21.5,7.5 39.2,7.5 39.4,7.3 39.4,5.6 39.2,5.4
(no net) on TOP: 35.8,58.6 63,58.6 63.8,57.8 63.8,55.3 63.1,54.6 57.3,54.6 55.8,56.1 50,56.1 49.1,55.2 38.7,55.2 37.2,53.7 35.2,53.7 35.2,58
(no net) on TOP: 21.5,22.6 26.6,22.6 27.8,23.8 27.8,27.8 21.1,27.8 20.5,27.2 20.5,24.1 21.3,24.1 21.5,23.9
(no net) on TOP: 21.7,52.3 26.8,52.3 28,53.5 28,57.5 21.3,57.5 20.7,56.9 20.7,53.8 21.5,53.8 21.7,53.6
(no net) on TOP: 5.3,7.2 2.7,9.8 2.7,53.3 4.4,55 16.7,55 16.7,52.5 17.1,52.1 19.1,52.1 19.1,51.7 10.1,51.7 9.5,51.1 9.5,40.1 16.7,40.1 16.7,37.6 17.1,37.2 19.1,37.2 19.1,36.8 7.2,36.8 6.6,36.2 6.6,25.8 7.1,25.3 16.5,25.3 16.5,22.8 16.9,22.4 18.9,22.4 18.9,22 9.8,22 9.3,21.5 9.3,10.6 16.5,10.6 16.5,8 16.9,7.6 18.9,7.6 18.9,7.2
(no net) on TOP: 21.7,37.4 26.8,37.4 28,38.6 28,42.6 21.3,42.6 20.7,42 20.7,38.9 21.5,38.9 21.7,38.7
(no net) on TOP: 35.8,43.7 63,43.7 63.8,42.9 63.8,40.4 63.1,39.7 57.3,39.7 55.8,41.2 50,41.2 49.1,40.3 38.7,40.3 37.2,38.8 35.2,38.8 35.2,43.1
(no net) on TOP: 21.5,7.8 26.6,7.8 27.8,9 27.8,13 21.1,13 20.5,12.4 20.5,9.3 21.3,9.3 21.5,9.1
N16756833 on TOP (solid shape): 28,53.5 26.8,52.3 26.03,52.3 25.84,52.48 23.76,52.48 23.76,52.51 21.7,52.51 21.7,53.6 21.5,53.8 20.7,53.8 20.7,56.9 21.3,57.5 28,57.5
N16758748 on TOP (solid shape): 28,38.6 26.8,37.4 26.03,37.4 25.84,37.58 23.76,37.58 23.76,37.61 21.7,37.61 21.7,38.7 21.5,38.9 20.7,38.9 20.7,42 21.3,42.6 28,42.6
N16760236 on TOP (solid shape): 27.8,23.8 26.6,22.6 25.83,22.6 25.64,22.78 23.56,22.78 23.56,22.81 21.5,22.81 21.5,23.9 21.3,24.1 20.5,24.1 20.5,27.2 21.1,27.8 27.8,27.8
N16764743 on TOP (solid shape): 27.8,9 26.6,7.8 25.83,7.8 25.64,7.98 23.56,7.98 23.56,8.01 21.5,8.01 21.5,9.1 21.3,9.3 20.5,9.3 20.5,12.4 21.1,13 27.8,13
N16756916 on TOP (solid shape): 18.22,53.28 18.3,53.31 18.38,53.28 19.1,52.55 18.3,52.37 17.5,52.55
N16758800 on TOP (solid shape): 18.22,38.38 18.3,38.41 18.38,38.38 19.1,37.65 18.3,37.47 17.5,37.65
N16760288 on TOP (solid shape): 18.02,23.58 18.1,23.61 18.18,23.58 18.9,22.85 18.1,22.67 17.3,22.85
N16765233 on TOP (solid shape): 18.02,8.78 18.1,8.81 18.18,8.78 18.9,8.05 18.1,7.87 17.3,8.05
N16769165 on TOP (solid shape): 10.77,63.7 10.9,63.74 11.03,63.7 11.5,63.14 10.9,62.48 10.3,63.14
N16769165 on TOP (solid shape): 11.71,65.22 11.08,64.59 10.9,64.51 10.72,64.59 10.09,65.22 10.65,65.46 11.15,65.46

Small or netless copper shapes (teardrops, artwork), in the pictures only: 82 on TOP

## Text on the board
Ref Des/Silkscreen Bottom: NAME:RFPW_V10A.BRD | DATE:2016_11_28 | BY :SMART HYBRID RADIO LAB
Ref Des/Silkscreen Top: VIN | VCC2 | VCC3 | VCC4 | VCC1
DIMENSION: FIGURE | SIZE | 0.3048 | 1.397 | 2.0 | DRILL CHART: TOP to BOTTOM | ALL UNITS ARE IN MILLIMETERS | PLATED | QTY | 256 | 25 | 4
